# Allegro board senior design v2.brd
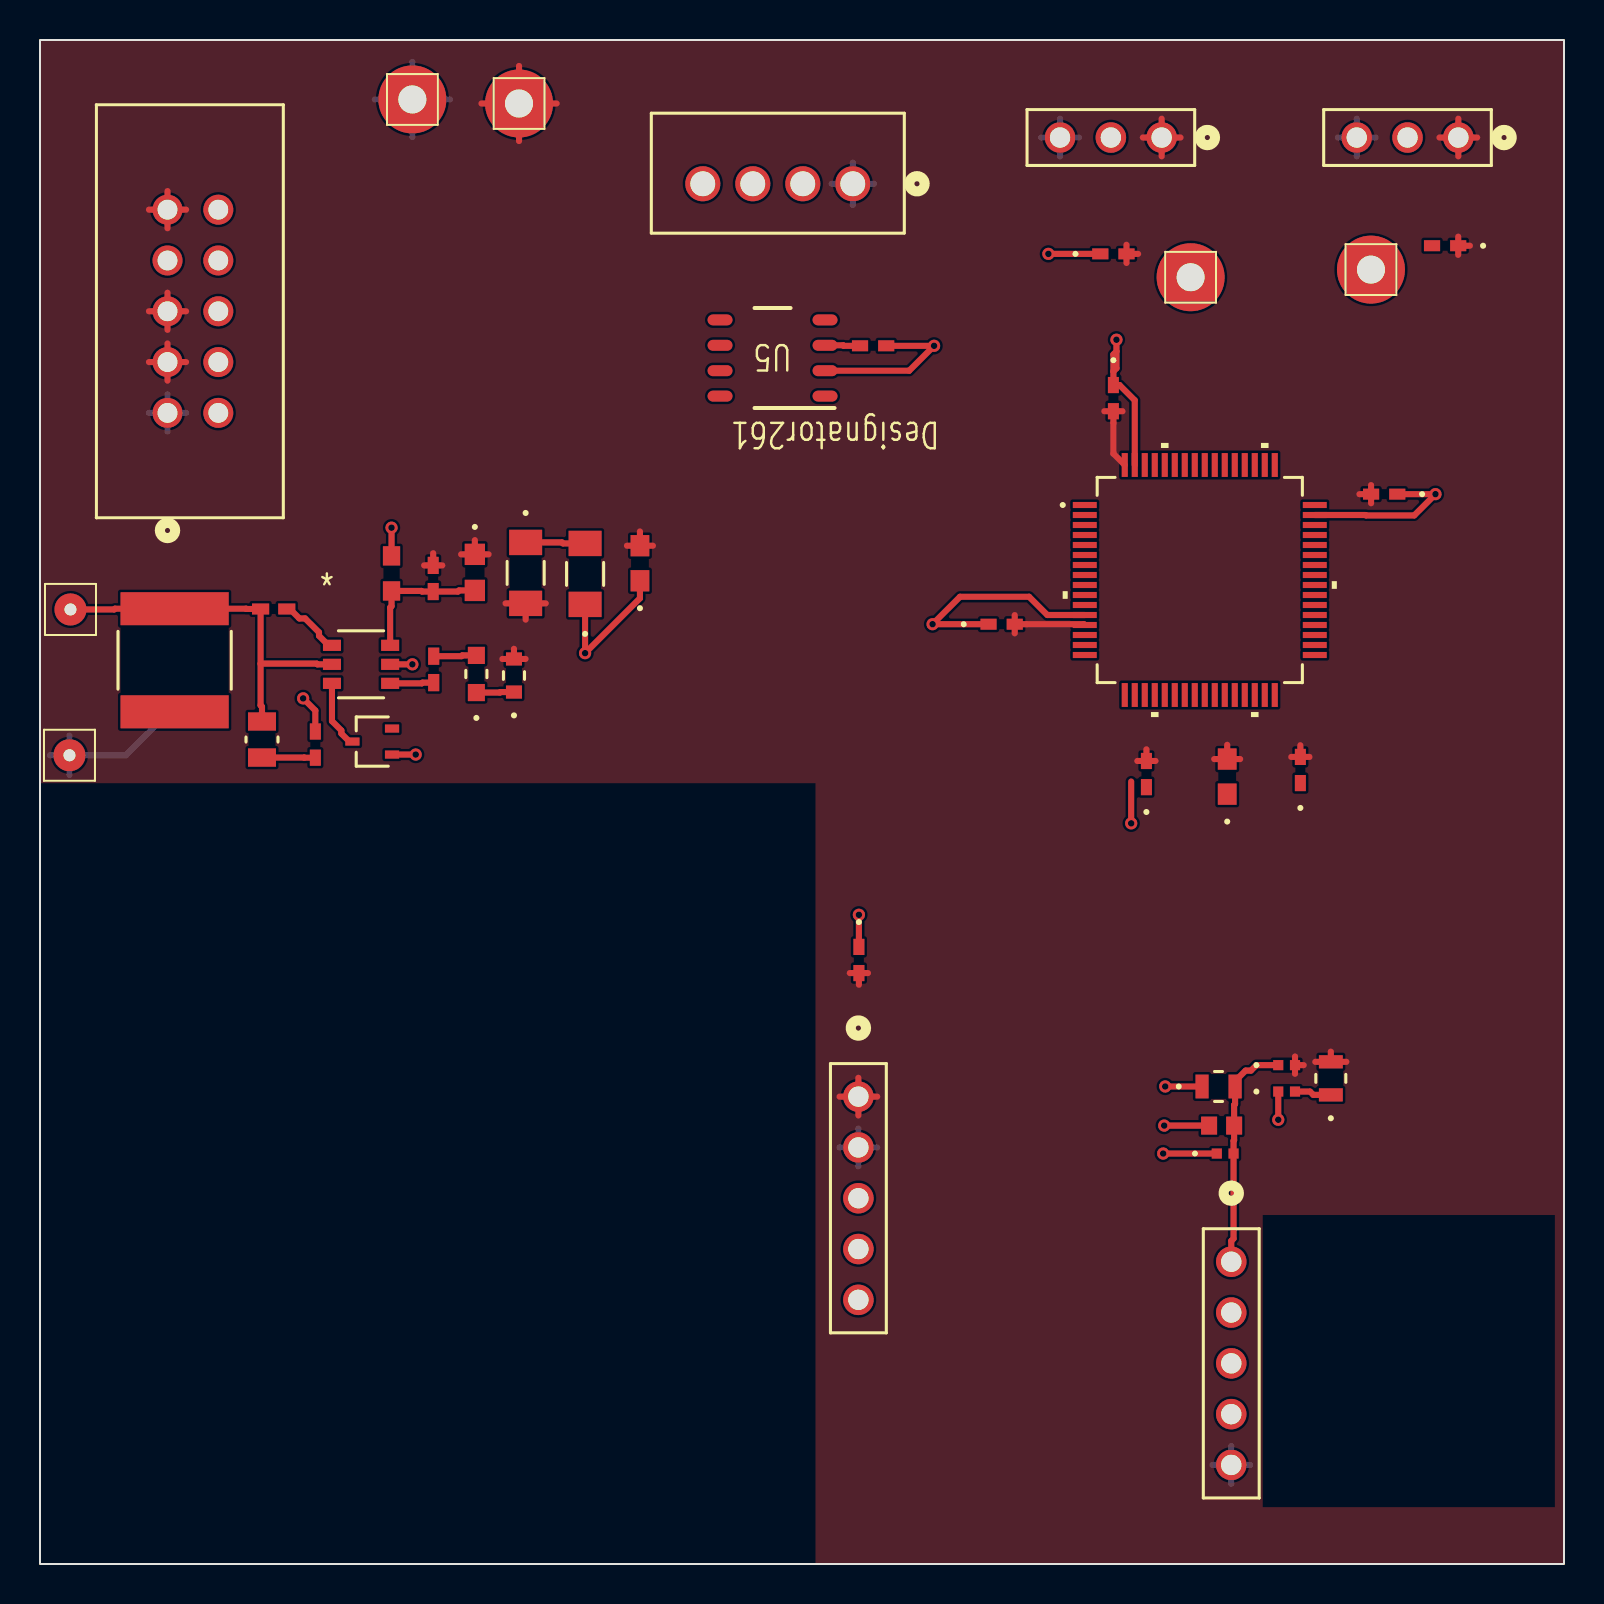
[diagram p0: board, top side]
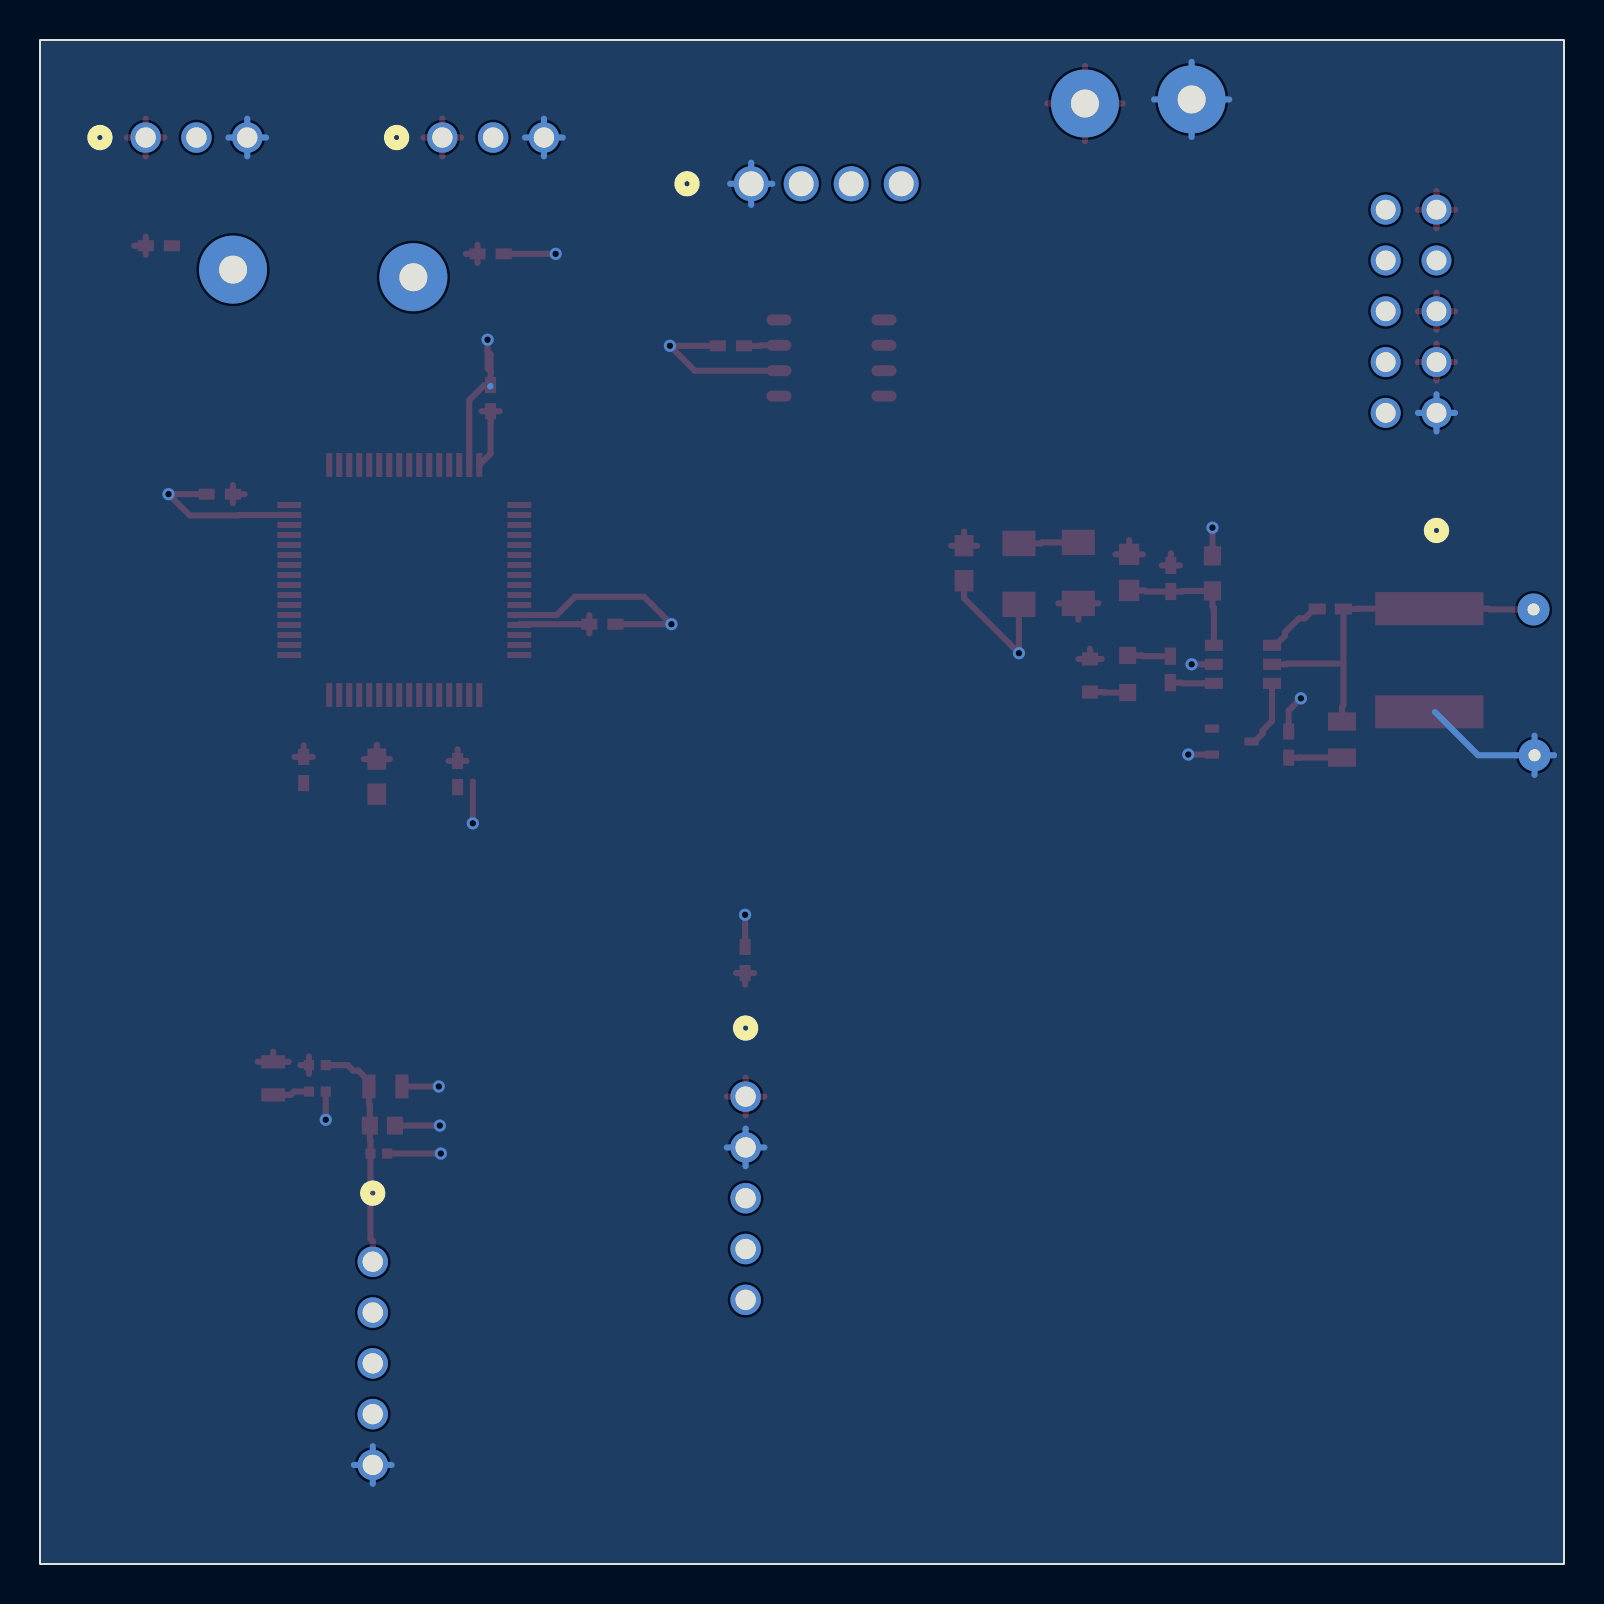
[diagram p1: board, bottom side, seen from below]

Outline 76.2 x 76.2 mm; copper layers: TOP, BOTTOM. Coordinates in mm from the lower left corner of the outline.
Outline path: rectangle 0,0 76.2,76.2

## Design rules (mm)
constraint set DEFAULT: min track width 0.305

## Placement (name value [footprint] x y rotation side)
C1  100n  [CAP_CL05_SAM-M]  41.66 60.91 180 top
C2  100n  [CAP_CL05_SAM-M]  53.67 65.51 0 top
C3  100n  [CAP_CL05_SAM-M]  40.94 30.2 270 top
C4  100n  [CAP_CL05_SAM-M]  70.26 65.91 180 top
C5  100n  [CAP_CL05_SAM-M]  63.02 39.7 90 top
C6  100n  [CAP_CL05_SAM-M]  48.08 46.99 0 top
C7  100n  [CAP_CL05_SAM-M]  55.32 39.5 90 top
C8  100n  [CAP_CL05_SAM-M]  67.21 53.49 180 top
C9  100n  [CAP_CL05_SAM-M]  53.67 58.29 270 top
C10  4.7uF  [CAP_0603_CL10A_1P6XP8_SAM-M]  30 50.04 90 top
C12  .1uf  [CAP_CL10_SAM-M]  21.82 44.5 90 top
C14  470pF  [CAP_0603G_AVX-M]  21.74 49.58 270 top
C20  10uF  [G-21_MUR-L]  64.54 24.28 90 top
C21  10uF  [G-21_MUR-L]  58.93 23.88 0 top
C22  .1uF  [CAPC17595_95N_KEM-L]  59.08 21.92 0 top
C23  47pF  [CAP_GJM1555C1H220JB01__MUR-L]  59.26 20.52 0 top
CANHEADER  CONN_B4B-XH-A  [CONN_B4B-XH-A_JST]  40.64 69.01 0 top
CEXT  4.7 uF  [CAP_0603_CL10A_1P6XP8_SAM-M]  59.36 39.37 90 top
CIN  10uF  [CAP_NTS_55_2P8T_NIP]  6.73 45.19 90 top
COUT  10uf  [G-31_MUR-M]  24.28 49.56 270 top
COUT1  10uf  [G-31_MUR-M]  27.25 49.5 90 top
GND  Battery-  [AMV_CON1]  1.47 40.44 0 top
GPSMODULE  CONN5_1LFBN-RC  [CONN5_1LFBN-RC_SUL]  40.92 23.37 270 top
JTAG  CONN_010P_000C_1  [CONN_SBH11-PBPC-D05-ST-BK_SUL]  6.38 57.56 90 top
L1  4.7uH  [IND_1608_TDK]  23.7 44.42 90 top
L3  INDUCTOR  [IND_BLM15_0402_MUR-L]  62.33 24.94 0 top
L4  INDUCTOR  [IND_BLM15_0402_MUR-L]  62.33 23.62 0 top
LORAMODULE  CONN5_1LFBN-RC  [CONN5_1LFBN-RC_SUL]  59.56 15.11 270 top
R1  15K  [RC0402N_PAN-M]  19.66 49.28 270 top
R2  4.7K  [RC0603N_YAG-M]  17.58 49.53 90 top
R3  51  [RC0402N_YAG-M]  19.69 44.73 270 top
R4  5.1K  [RC0402N_PAN-M]  11.68 47.75 0 top
R5  30K  [RES_R0805_ROM-M]  11.1 41.22 270 top
R6  10K  [RES_1005_SAM-M]  13.77 40.97 270 top
SPEEDCONTROLLER  CONN_PPTC031  [CONN_PPTC031_SUL]  70.92 71.32 0 top
STEERINGSERVO  CONN_PPTC031  [CONN_PPTC031_SUL]  56.08 71.32 0 top
TP1  TEST POINT  [AMV_TEST_POINT]  66.55 64.72 0 top
TP3  TEST POINT  [AMV_TEST_POINT]  57.53 64.34 0 top
TP4  TEST POINT  [AMV_TEST_POINT]  23.95 73.03 0 top
TP5  TEST POINT  [AMV_TEST_POINT]  18.62 73.23 0 top
U1  SB007-03Q-TL-E  [SOT-323-3_2X1P25_ONS-L]  16.61 41.12 90 top
U3  STM32F4XXR2  [LQFP64-10X10MM]  57.99 49.2 0 top
U5  TCAN1042H-Q1D  [D0008A_L]  36.63 60.3 180 top
U6  R1240N001x  [SOT-23-6W_PE-SOT23-6W-0512_NMD]  16.05 44.98 0 top
VIN  Battery+  [AMV_CON1]  1.52 47.73 0 top

## Library data of the parts
C1-C10 C12 C14 C20-C23 CEXT COUT COUT1 = C: User Part Number: PN; Tolerance: TOL
CANHEADER = B4B-XH-A: User Part Number: PN; Tolerance: TOL
CIN = KTS500B106M55N0T00: User Part Number: PN; Tolerance: TOL
GND VIN = CON1
GPSMODULE LORAMODULE = PPTC051LFBN-RC: User Part Number: PN; Tolerance: TOL
JTAG = SBH11-PBPC-D05-ST-BK: User Part Number: PN; Tolerance: TOL
L1 = SLF7045T-4R7M2R0-PF: User Part Number: PN; Tolerance: TOL
L3 L4 = INDUCTOR: User Part Number: PN; Tolerance: TOL
R1-R6 = R: User Part Number: PN; Tolerance: TOL
SPEEDCONTROLLER STEERINGSERVO = PPTC031LFBN-RC: User Part Number: PN; Tolerance: TOL
TP1 TP3-TP5 = TEST POINT
U1 = SB007-03Q-TL-E: User Part Number: PN; Tolerance: TOL
U3 = STM32F446RET6TR: User Part Number: PN; Tolerance: TOL
U5 = TCAN1042HDRQ1: Tolerance: TOL; User Part Number: PN
U6 = R1240N001B-TR-FE: User Part Number: PN; Tolerance: TOL

## Footprints (pads in the part's own frame, mm; a bottom-side part is the same pattern mirrored in y, then rotated)
AMV_CON1
  round 1.6 hole 0.6: 1(0,0)
AMV_TEST_POINT
  round 3.4 hole 1.4: 1(0,0)
CAP_0603_CL10A_1P6XP8_SAM-M
  rect 1.067x0.94 smd: 1(-0.876,0) 2(0.876,0)
CAP_0603G_AVX-M
  rect 1.067x1.016 smd: 1(-0.902,0) 2(0.902,0)
CAP_CL05_SAM-M
  rect 0.809x0.551 smd: 1(-0.654,0) 2(0.654,0)
CAP_CL10_SAM-M
  rect 0.859x0.851 smd: 1(-0.929,0) 2(0.929,0)
CAP_GJM1555C1H220JB01__MUR-L
  rect 0.508x0.508 smd: 1(-0.419,0) 2(0.419,0)
CAP_NTS_55_2P8T_NIP
  rect 1.651x5.41 smd: 1(-2.578,0) 2(2.578,0)
CAPC17595_95N_KEM-L
  rect 0.802x0.899 smd: 1(-0.626,0) 2(0.626,0)
CONN5_1LFBN-RC_SUL
  round 1.524 hole 1.016: 1(0,0) 2(2.54,0) 3(5.08,0) 4(7.62,0) 5(10.16,0)
CONN_B4B-XH-A_JST
  round 1.753 hole 1.245: 1(0,0) 2(-2.5,0) 3(-5,0) 4(-7.5,0)
CONN_PPTC031_SUL
  round 1.524 hole 1.016: 1(0,0) 2(-2.54,0) 3(-5.08,0)
CONN_SBH11-PBPC-D05-ST-BK_SUL
  round 1.499 hole 0.991: 1(0,0) 2(0,-2.54) 3(2.54,0) 4(2.54,-2.54) 5(5.08,0) 6(5.08,-2.54) 7(7.62,0) 8(7.62,-2.54) 9(10.16,0) 10(10.16,-2.54)
D0008A_L
  oval 1.25x0.55 smd: 1(-2.625,1.905) 2(-2.625,0.635) 3(-2.625,-0.635) 4(-2.625,-1.905) 5(2.625,-1.905) 6(2.625,-0.635) 7(2.625,0.635) 8(2.625,1.905)
G-21_MUR-L
  rect 0.66x1.194 smd: 1(-0.826,0) 2(0.826,0)
G-31_MUR-M
  rect 1.27x1.651 smd: 1(-1.524,0) 2(1.524,0)
IND_1608_TDK
  rect 0.656x0.8 smd: 1(-0.828,0) 2(0.828,0)
IND_BLM15_0402_MUR-L
  rect 0.508x0.508 smd: 1(-0.419,0) 2(0.419,0)
LQFP64-10X10MM
  rect 1.194x0.305 smd: 1(-5.75,3.75) 2(-5.75,3.25) 3(-5.75,2.75) 4(-5.75,2.25) 5(-5.75,1.75) 6(-5.75,1.25) 7(-5.75,0.75) 8(-5.75,0.25) 9(-5.75,-0.25) 10(-5.75,-0.75) 11(-5.75,-1.25) 12(-5.75,-1.75) 13(-5.75,-2.25) 14(-5.75,-2.75) 15(-5.75,-3.25) 16(-5.75,-3.75) 33(5.75,-3.75) 34(5.75,-3.25) 35(5.75,-2.75) 36(5.75,-2.25) 37(5.75,-1.75) 38(5.75,-1.25) 39(5.75,-0.75) 40(5.75,-0.25) 41(5.75,0.25) 42(5.75,0.75) 43(5.75,1.25) 44(5.75,1.75) 45(5.75,2.25) 46(5.75,2.75) 47(5.75,3.25) 48(5.75,3.75)
  rect 0.305x1.194 smd: 17(-3.75,-5.75) 18(-3.25,-5.75) 19(-2.75,-5.75) 20(-2.25,-5.75) 21(-1.75,-5.75) 22(-1.25,-5.75) 23(-0.75,-5.75) 24(-0.25,-5.75) 25(0.25,-5.75) 26(0.75,-5.75) 27(1.25,-5.75) 28(1.75,-5.75) 29(2.25,-5.75) 30(2.75,-5.75) 31(3.25,-5.75) 32(3.75,-5.75) 49(3.75,5.75) 50(3.25,5.75) 51(2.75,5.75) 52(2.25,5.75) 53(1.75,5.75) 54(1.25,5.75) 55(0.75,5.75) 56(0.25,5.75) 57(-0.25,5.75) 58(-0.75,5.75) 59(-1.25,5.75) 60(-1.75,5.75) 61(-2.25,5.75) 62(-2.75,5.75) 63(-3.25,5.75) 64(-3.75,5.75)
RC0402N_PAN-M
  rect 0.859x0.551 smd: 1(-0.654,0) 2(0.654,0)
RC0402N_YAG-M
  rect 0.864x0.559 smd: 1(-0.66,0) 2(0.66,0)
RC0603N_YAG-M
  rect 0.965x0.864 smd: 1(-0.876,0) 2(0.876,0)
RES_1005_SAM-M
  rect 0.809x0.551 smd: 1(-0.654,0) 2(0.654,0)
RES_R0805_ROM-M
  rect 0.914x1.397 smd: 1(-0.902,0) 2(0.902,0)
SOT-23-6W_PE-SOT23-6W-0512_NMD
  rect 0.902x0.559 smd: 1(-1.454,0.95) 2(-1.454,0) 3(-1.454,-0.95) 4(1.454,-0.95) 5(1.454,0) 6(1.454,0.95)
SOT-323-3_2X1P25_ONS-L
  rect 0.406x0.711 smd: 1(-0.65,-0.991) 2(0.65,-0.991) 3(0,0.991)

## Nets
3.3V: C2.2 C3.2 C4.1 C5.2 C6.2 C7.2 C8.2 C9.2 C10.2 C14.1 C20.2 CEXT.2 COUT.2 GPSMODULE.1 JTAG.3 JTAG.5 JTAG.9 L1.2 L3.2 R1.1 SPEEDCONTROLLER.1 STEERINGSERVO.1 TP4.1 U3.13 U3.19 U3.32 U3.48 U3.64
GND: CIN.1
VBAT: U3.1
0: C1.1 C2.1 C3.1 C4.2 C5.1 C6.1 C7.1 C8.1 C9.1 C10.1 C21.1 C22.1 C23.1 CANHEADER.1 COUT1.1 GND.1 GPSMODULE.2 JTAG.1 L4.1 LORAMODULE.5 R2.2 R6.1 SPEEDCONTROLLER.3 STEERINGSERVO.3 TP5.1 U1.1 U3.12 U3.18 U3.31 U3.47 U3.63 U5.2 U6.5
ADC: R5.2 R6.2 U3.16
PA13 TMS: JTAG.10 U3.46
PA14 TCLK: U3.49
PA14TCLK: JTAG.8
PA15 TDI: JTAG.4 U3.50
PB3 TBO: JTAG.6 U3.55
RESET: JTAG.2 U3.7
N04277: GPSMODULE.3 U3.26
N04281: GPSMODULE.4 U3.52
N04285: GPSMODULE.5 U3.51
N04355: SPEEDCONTROLLER.2 TP1.1 U3.41
N04395: STEERINGSERVO.2 TP3.1 U3.37
N04429: C21.2 C22.2 C23.2 L3.1 LORAMODULE.1
N04477: LORAMODULE.2 U3.14
N04485: LORAMODULE.3 U3.15
N04755: U3.44 U5.8
N04759: U3.43 U5.4
N04763: U3.45 U5.1
N04855: CANHEADER.4 U5.6
N17576: C14.2 R1.2 R2.1 U6.6
N17942: R3.2 U6.4
N18028: C12.1 L1.1 U1.3 U6.3
N24517: LORAMODULE.4 U3.17
N24691: CANHEADER.3 U5.7
N24886: C1.2 CANHEADER.2 U5.3(VCC)
N27410: C20.1 L4.2
N27791: CEXT.1 U3.30
N055670: R4.2 U6.1
N061071: C12.2 R3.1
N068040: COUT.1 COUT1.2
N088060: CIN.2 R4.1 R5.1 U6.2(VIN) VIN.1

Pads without a net: JTAG 7; U1 2; U3 2 3 4 5 6 8 9 10 11 20 21 22 23 24 25 27 28 29 33 34 35 36 38 39 40 42 53 54 56 57 58 59 60 61 62; U5 5

## Via types
v1: diameter 0.61, hole 0.33, TOP to BOTTOM, 16 vias

## Routing (per net, layer and track width the routed paths; a pad name or vN(x,y) marks a point on that pad's centre or on a via; arc(x,y) is an arc through that point)
3.3V: length 62.6
  TOP w0.305: 65.97,53.49 C8.2 ; C8.2 66.55,53.04 ; C8.2 66.55,53.95 ; C14.1 21.74,51.19 ; C14.1 22.43,50.48 ; C14.1 21.06,50.48 ; 22.07,73.03 TP4.1 ; TP4.1 23.95,71.15 ; TP4.1 23.95,74.9 ; TP4.1 25.83,73.03 ; 63.77,25.11 C20.2 ; C20.2 64.54,25.62 ; C20.2 65.32,25.11 ; STEERINGSERVO.1 57.02,71.32 ; STEERINGSERVO.1 56.08,72.26 ; STEERINGSERVO.1 56.08,70.38 ; STEERINGSERVO.1 55.14,71.32 ; JTAG.9 7.3,67.72 ; JTAG.9 6.38,68.64 ; JTAG.9 5.45,67.72 ; JTAG.9 6.38,66.79 ; C10.2 30,51.63 ; C10.2 30.65,50.91 ; C10.2 29.35,50.91 ; C5.2 63.02,40.94 ; C5.2 62.56,40.35 ; C5.2 63.47,40.35 ; JTAG.5 6.38,63.56 ; JTAG.5 7.3,62.64 ; JTAG.5 5.45,62.64 ; JTAG.5 6.38,61.71 ; JTAG.3 7.3,60.1 ; JTAG.3 6.38,61.02 ; JTAG.3 5.45,60.1 ; JTAG.3 6.38,59.17 ; L3.2 63.18,24.94 ; L3.2 62.75,25.38 ; L3.2 62.75,24.51 ; COUT.2 25.29,48.03 ; COUT.2 24.28,47.22 ; COUT.2 23.28,48.03 ; 23.12,45.25 L1.2 ; L1.2 23.7,45.76 ; L1.2 24.28,45.25 ; 19.21,49.93 R1.1 ; R1.1 20.11,49.93 ; R1.1 19.66,50.54 ; 70.92,70.38 SPEEDCONTROLLER.1 ; SPEEDCONTROLLER.1 69.98,71.32 ; SPEEDCONTROLLER.1 70.92,72.26 ; SPEEDCONTROLLER.1 71.86,71.32 ; CEXT.2 60.01,40.25 ; CEXT.2 59.36,40.96 ; CEXT.2 58.71,40.25 ; 70.91,65.46 C4.1 ; C4.1 70.91,66.37 ; C4.1 71.49,65.91 ; 54.32,65.05 C2.2 ; C2.2 54.32,65.96 ; C2.2 54.91,65.51 ; 40.49,29.55 C3.2 ; C3.2 40.94,28.96 ; C3.2 41.4,29.55 ; U3.64 53.67,55.52 C9.2 ; C7.2 55.32,40.73 ; C7.2 55.77,40.15 ; C7.2 54.87,40.15 ; C9.2 54.12,57.64 ; C9.2 53.22,57.64 ; U3.13 52.2,46.99 C6.2 ; GPSMODULE.1 41.86,23.37 ; GPSMODULE.1 40.92,22.43 ; GPSMODULE.1 39.98,23.37 ; GPSMODULE.1 40.92,24.31 ; C6.2 48.74,46.54 ; C6.2 48.74,47.44
0: length 102.7
  TOP w0.305: U3.12 50.37,47.45 49.45,48.36 46,48.36 v1(44.63,46.99) C6.1 ; 53.67,59.63 53.67,60.48 53.82,60.63 ; 53.67,59.63 C9.1 53.98,58.95 54.74,58.18 U3.63 ; 53.67,59.63 53.82,59.78 53.82,60.63 ; C10.1 30,48.29 v1(27.25,45.54) COUT1.1 ; 53.82,60.63 v1(53.82,61.21) ; C3.1 v1(40.94,32.46) ; C8.1 v1(69.77,53.49) 68.71,52.43 66.3,52.43 66.28,52.45 U3.47 ; U5.2 43.46,59.66 v1(44.7,60.91) C1.1 ; v1(13.16,43.28) 13.77,42.67 R6.1 ; L4.1 v1(61.91,22.21) ; U1.1 v1(18.79,40.47) ; C2.1 v1(50.42,65.51) ; U6.5 v1(18.62,44.98) ; C22.1 v1(56.21,21.92) ; 54.56,39.12 v1(54.56,37.03) ; R2.2 v1(17.58,51.82) ; C21.1 v1(56.26,23.88) ; C23.1 v1(56.16,20.52)
  BOTTOM w0.305: CANHEADER.1 40.64,70.07 ; CANHEADER.1 40.64,67.96 ; CANHEADER.1 39.59,69.01 ; CANHEADER.1 41.69,69.01 ; 5.45,57.56 JTAG.1 ; JTAG.1 7.3,57.56 ; JTAG.1 6.38,58.48 ; JTAG.1 6.38,56.63 ; 39.98,20.83 GPSMODULE.2 ; GPSMODULE.2 40.92,19.89 ; GPSMODULE.2 41.86,20.83 ; GPSMODULE.2 40.92,21.77 ; 59.56,4.01 LORAMODULE.5 ; LORAMODULE.5 60.5,4.95 ; LORAMODULE.5 59.56,5.89 ; LORAMODULE.5 58.62,4.95 ; STEERINGSERVO.3 51,72.26 ; STEERINGSERVO.3 50.06,71.32 ; STEERINGSERVO.3 51.94,71.32 ; STEERINGSERVO.3 51,70.38 ; 16.74,73.23 TP5.1 ; TP5.1 20.5,73.23 ; TP5.1 18.62,75.11 ; TP5.1 18.62,71.35 ; 6.45,42.6 4.29,40.44 GND.1 ; GND.1 1.47,39.46 ; GND.1 0.49,40.44 ; GND.1 1.47,41.42 ; SPEEDCONTROLLER.3 65.84,72.26 ; SPEEDCONTROLLER.3 64.9,71.32 ; SPEEDCONTROLLER.3 65.84,70.38 ; SPEEDCONTROLLER.3 66.78,71.32 ; 53.67,58.9 53.7,58.88
ADC: length 2.7
  TOP w0.305: R6.2 13.21,40.32 13.21,40.32 R5.2
N04429: length 11.6
  TOP w0.305: L3.1 60.82,24.94 60.55,24.67 60.28,24.67 59.75,24.14 C21.2 59.75,23 59.71,22.95 C22.2 59.71,21.19 59.68,21.16 C23.2 59.68,16.27 59.56,16.15 LORAMODULE.1
N17576: length 7
  TOP w0.305: C14.2 20.96,48.68 20.9,48.62 R1.2 19.1,48.62 19.07,48.65 R2.1 17.58,47.89 17.51,47.82 U6.6
N17942: length 2.2
  TOP w0.305: R3.2 19.13,44.07 19.09,44.03 U6.4
N18028: length 5.3
  TOP w0.305: C12.1 22.99,43.57 23.02,43.6 L1.1 ; U1.3 15.47,41.12 15.07,41.52 15.07,41.68 14.6,42.14 U6.3
N24886: length 1.8
  TOP w0.305: U5.3 40.16,60.93 40.18,60.91 C1.2
N27410: length 1.9
  TOP w0.305: C20.1 63.67,23.46 63.5,23.62 L4.2
N055670: length 3.1
  TOP w0.305: R4.2 12.49,47.75 12.97,47.28 13.25,47.28 13.95,46.58 13.95,46.41 14.43,45.93 U6.1
N061071: length 2.2
  TOP w0.305: R3.1 21.07,45.39 21.11,45.43 C12.2
N068040: length 3
  TOP w0.305: COUT1.2 26.15,51.03 26.1,51.08 COUT.1
N088060: length 18.8
  TOP w0.305: 11.03,45.02 11.03,42.93 11.1,42.86 R5.1 ; 11.03,45.02 13.83,45.02 13.87,44.98 U6.2 ; 11.03,45.02 R4.1 10.32,47.75 10.31,47.76 CIN.2 3.75,47.76 3.71,47.73 VIN.1

## Copper pours and planes (outline as drawn; the poured copper is in the pictures)
3.3V on TOP: 0.03,76.2 76.2,76.2 76.2,0 0.03,0
0 on BOTTOM: 0,76.2 76.2,76.2 76.2,0 0,0
